# Altium PCB ESense.PcbDoc (part 2 of 3)
Units mil, origin at the board's own origin, x right, y up, seen from the top; angles counter-clockwise.
Board outline 9200 x 6300 mil, 4 copper layers (Top Layer, GND, POWER, Bottom Layer); 365 components, 215 nets, 1056 pads, 220 vias.
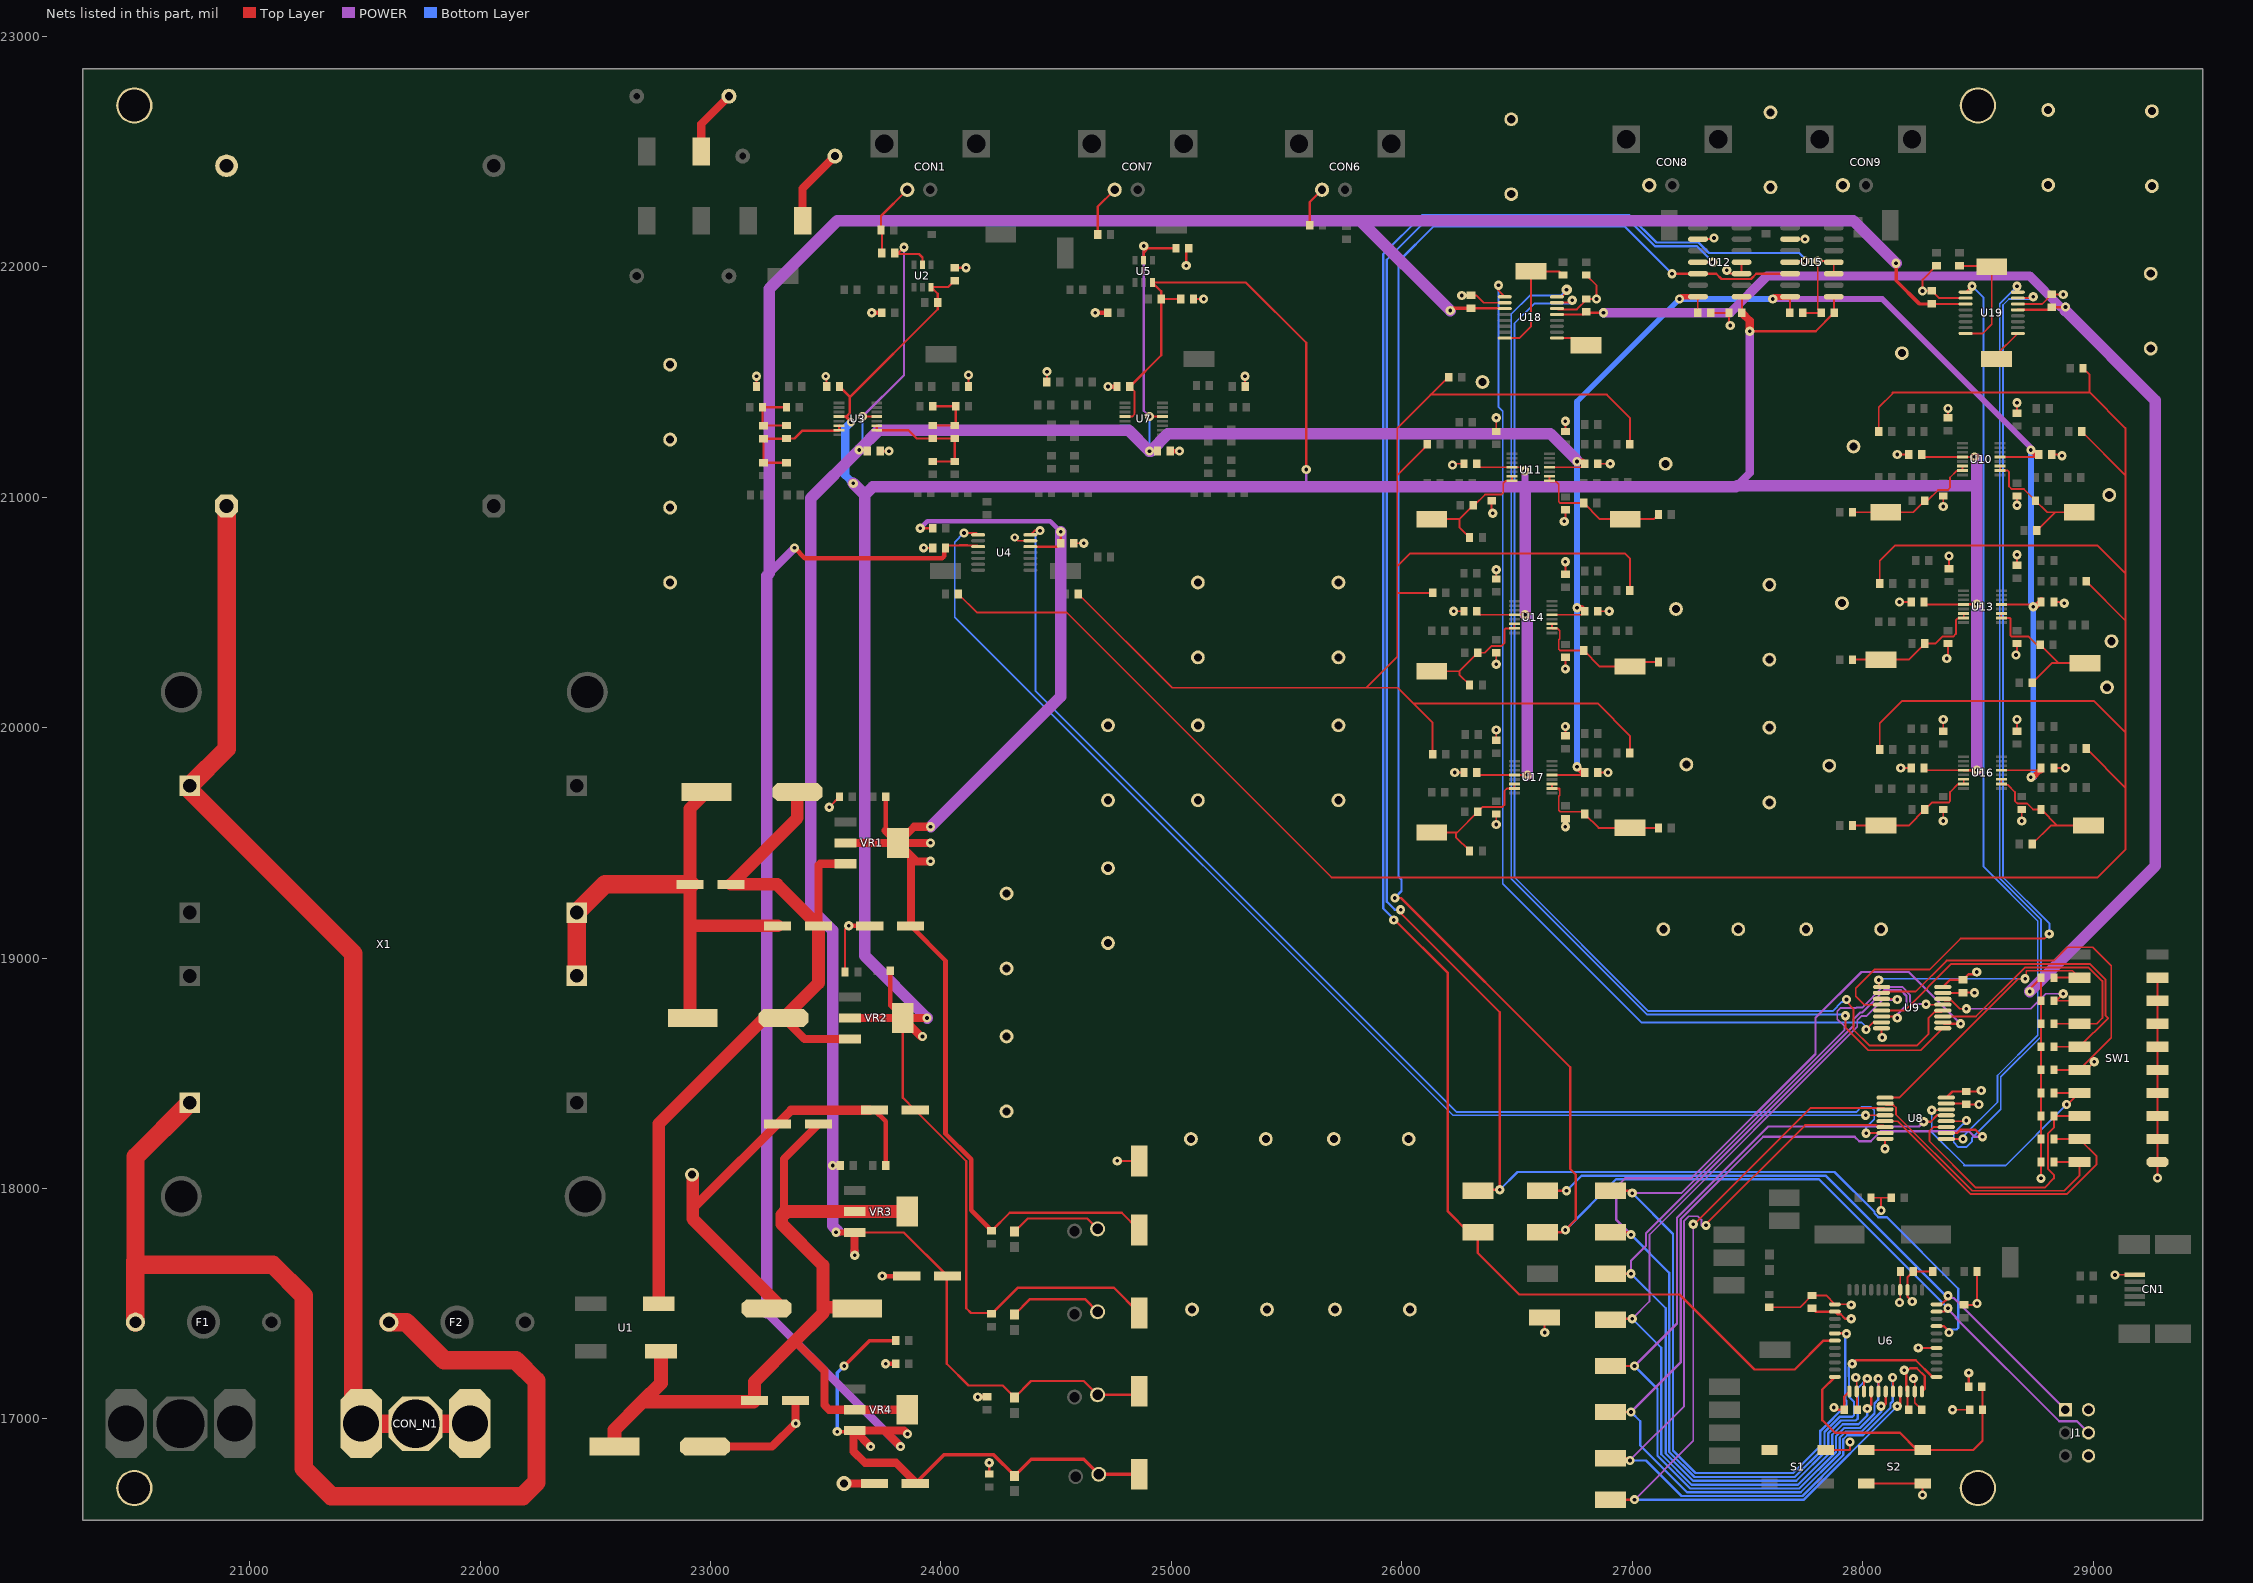
[diagram p4: the nets of this part, all layers, seen from the top]

## Via types
v1: diameter 40/36/36 (per signal layer), hole 16, Top Layer to Bottom Layer, tented both sides, 213 vias
v2: diameter 36, hole 16, Top Layer to Bottom Layer, 2 vias
v3: diameter 40/36/36 (per signal layer), hole 16, Top Layer to Bottom Layer, 1 vias
v4: diameter 35/36/36 (per signal layer), hole 16, Top Layer to Bottom Layer, tented both sides, 1 vias
v5: diameter 40/46/46 (per signal layer), hole 16, Top Layer to Bottom Layer, tented both sides, 1 vias
v6: diameter 60, hole 35, Top Layer to Bottom Layer, tented both sides, 1 vias
v7: diameter 65, hole 35, Top Layer to Bottom Layer, tented both sides, 1 vias

## Nets (pads, with @x,y where several pads share a name; then routed paths per layer and width w, separated by ;. In a path a pad name is that pad's centre, name@x,y a point inside that pad or via, vN(x,y) a via of type N, cw(c..) or ccw(c..) an arc to the next point about the centre after c; other vN are vias at no path point)
+2.5V: C4.1 C6.1 C16.1 C29.1 C44.1 C51.2 C59.2 C62.2 C81.2 C83.2 C88.2 C102.2 C104.2 R5.2 R7.2 R13.1 R44.2 TP2V5.1 U2.6 U3.4 U5.6 U7.4 U10.4 U11.4 U12.8 U13.4 U14.4 U15.8 U16.4 U17.4 VR2.3 | length 19017.4
  Top Layer w8: U7.4@24798.31,21349.84 24829.84,21349.84 24840,21360 24840,21460 C44.1@24820,21480 ; C104.2@26326,19805 26336.16,19794.84 U17.4@26488.31,19794.84 26544.84,19794.84 v1(26545,19795) ; C83.2@26326,20505 26341.16,20489.84 U14.4@26488.31,20489.84 v1@26534.84,20489.84 ; C62.2@26326,21145 26341.16,21129.84 U11.4@26478.31,21129.84 26520.16,21129.84 v1(26535,21115) ; U12.8@27474.49,21870 27476,21868.49 C51.2@27476,21800 ; C88.2@27876,21800 U15.8@27876,21868.49 ; C59.2@28256,21185 28266.16,21174.84 U10.4@28433.31,21174.84 ; C81.2@28256.16,20534.84 U13.4@28438.31,20534.84 ; C102.2@28266,19825 28276.16,19814.84 U16.4@28438.31,19814.84
  Top Layer w10: U3.4@23558.31,21349.84 23589.84,21349.84 23605,21365 23605,21435 ; C16.1@23560,21480 23605,21435 ; VR2.3@23834.17,18740 23834.17,18394.41 C6.1@23888.58,18340 24110,18118.58 24110,17480 24130,17460 24216,17460 R7.2@24220,17456 24334,17570 24750,17570 TP2V5.1@24860,17460 ; C4.1@24060,21940 24031.77,21911.77 U2.6@23957.4,21911.77 23986,21883.17 R5.2@23986,21845 23986,21816 23605,21435 ; C44.1@24820,21480 24956,21616 R44.2@24956,21860 ; C29.1@25040,21860 R44.2@24956,21860 ; v1(25585,21120) 25585,21670 25323.23,21931.77 U5.6@24917.4,21931.77 24956,21893.17 R44.2@24956,21860 ; v1(27510,21720) 27796,21720 C88.2@27876,21800 ; U10.4@28433.31,21174.84 v1@28484.84,21174.84 ; U16.4@28438.31,19814.84 28438.46,19815 v1(28495,19815) ; U13.4@28438.31,20534.84 v1@28484.84,20534.84
  Top Layer w15: 23589.84,21349.84 v4@23610,21329.69
  Top Layer w20: R13.1@23780,18945 23780,18794.17 VR2.3@23834.17,18740
  Top Layer w35: VR2.3@23605.83,18740 VR2.3@23834.17,18740 ; v1(23920,18660) 23914.17,18660 VR2.3@23834.17,18740 ; v1(23940,18740) VR2.3@23834.17,18740 ; C51.2@27476,21800 27510,21766 v1(27510,21720)
  POWER w8: v1(26535,20490) v1@26545,20480 ; 26535,21045 26535,21050 26540,21045
  POWER w10: 25585,21045 v1(25585,21120)
  POWER w30: 26535,21050 v1(26535,21115) ; v1(28485,21175) v1@28495,21165
  POWER w35: 26535,21045 26540,21045 ; 27455,21050 27510,21105 v1(27510,21720)
  POWER w50: v1(23620,21060) 23670,21010 ; 23667.5,21007.5 23670,21010 ; v1(23940,18740) 23670,19010 23670,21010 ; v1(26535,20490) 26535,21045 25585,21045 23705,21045 23670,21010 ; 26540,21045 27450,21045 ; v1(26545,19795) v1@26545,20480 ; 27455,21050 28495,21050 ; v1(28495,19815) v1(28495,20535) ; v1@28495,20540 28495,21050 ; v1@28495,21165 28495,21050
  Bottom Layer w35: v4(23610,21325) 23585,21300 23585,21095 v1(23620,21060)
+5V: C3.1 C28.1 C33.1 C34.1 C35.1 C36.1 C49.2 C50.2 C115.2 C117.2 J1.2 R3.2 R4.1 R34.1 R53.2 R57.1 R61.2 R62.2 R63.2 R64.2 R65.2 R66.2 R67.2 R68.2 R69.2 TP5V.1 U4.12 U6.14 U6.24 U6.34 U6.42 U6.44 U8.16 U9.16 U18.13 U19.13 VR1.3 | length 14101.3
  Top Layer w10: v1(23910,20865) R34.1@23965,20865 ; R3.2@24220,17816 24299,17895 24785,17895 TP5V.1@24860,17820 ; U4.12@24388.19,20785.59 24505.59,20785.59 C28.1@24520,20800 v1(24520,20850) ; U18.13@26673.19,21792.8 26788.8,21792.8 C117.2@26800,21804 26804,21800 v1(26875,21800) ; C35.1@27780,17480 27795,17465 27878.54,17465 U6.24@27879.53,17465.98 27891.02,17454.49 27904.4,17454.49 27923.89,17435 v1(27950,17435) ; v1(27875,17050) 27885,17040 C34.1@27920,17040 27920,17097.01 U6.34@27942.52,17119.53 ; v1(28180,17211) 28180,17213.98 v1@28175,17210 ; C36.1@28200,17040 28194.49,17045.51 U6.42@28194.49,17119.53 28189,17125.02 28189,17194 v1@28175,17210 ; v1(28215,17510) 28194.49,17530.51 U6.14@28194.49,17560.47 28194.49,17614.49 C33.1@28220,17640 R53.2@28304,17640 ; U6.44@28257.48,17119.53 28270,17132.05 28270,17185 28235,17220 28205,17220 28194.49,17209.49 v1@28175,17210 ; U9.16@28347.87,18874.57 28379.31,18906 C50.2@28435,18906 28459,18930 28485,18930 v1(28495,18940) ; U8.16@28362.87,18394.57 28389.31,18421 C49.2@28450,18421 28511,18421 v1(28515,18425) ; R57.1@28460,17140 v1(28460,17200) ; U19.13@28673.19,21812.8 28808.8,21812.8 C115.2@28820,21824 28879,21824 v1(28880,21825) ; v1(28725,18855) 28725,18866 R69.2@28774,18915 v1(28774,18044)
  Top Layer w20: 23760,19554.17 R4.1@23760,19700 ; C3.1@23868.58,19140 24020,18988.58 24020,18238.28 24131,18127.28 24131,17905 R3.2@24220,17816
  Top Layer w35: VR1.3@23585.83,19500 VR1.3@23814.17,19500 ; 23760,19554.17 VR1.3@23814.17,19500 ; C3.1@23868.58,19140 23870,19141.42 23870,19444.17 VR1.3@23814.17,19500 ; v1(23955,19420) 23894.17,19420 VR1.3@23814.17,19500 ; v1(23955,19500) VR1.3@23814.17,19500 ; v1(23955,19570) 23884.17,19570 VR1.3@23814.17,19500
  POWER w10: v1@28495,18925 v1(28495,18940)
  POWER w20: v1(23910,20865) 23940,20895 24475,20895 v1(24520,20850)
  POWER w25: v1@28860,21825 v1(28880,21825) v1@28880,21810
  POWER w40: v1(26875,21800) 27425,21800 27585,21960 28725,21960 v1@28860,21825 ; v1@28875,21820 v1(28880,21825)
  POWER w50: v1(23955,19570) 24520,20135 v1(24520,20850) ; v1(28725,18855) 29270,19400 29270,21420 v1@28880,21810
+6.3V: C1.1 C2.1 C7.1 C8.1 U1.4 VR1.1 VR2.1 | length 3659.1
  Top Layer w35: C8.1@23316.85,18740 23407.4,18649.45 VR2.1@23605.83,18649.45 ; C7.1@23468.58,19140 23468.58,19403.58 23474.45,19409.45 VR1.1@23585.83,19409.45
  Top Layer w55: U1.4@22775.28,17500 22775.28,17629.72 22775,17630 22775,18280 23235,18740 C8.1@23316.85,18740 23468.58,18891.73 C7.1@23468.58,19140 23288.58,19320 C1.1@23088.58,19320 23376.85,19608.27 C2.1@23376.85,19720
-2.5V: C5.1 C13.2 C17.1 C30.1 C45.1 C60.2 C63.2 C72.2 C82.2 C84.2 C103.2 C105.2 C106.2 CON4.2 D3.2 R28.2 TP_-2V5.1 U2.2 U3.13 U5.2 U7.13 U10.13 U11.13 U12.7 U13.13 U14.13 U15.7 U16.13 U17.13 VR3.3 | length 18246.8
  Top Layer w8: U11.13@26641.69,21129.84 26778.84,21129.84 C63.2@26794,21145 ; U17.13@26651.69,19794.84 26783.84,19794.84 C105.2@26794,19805 ; U14.13@26651.69,20489.84 26778.84,20489.84 C84.2@26794,20505 ; C72.2@27284,21800 27284,21868.49 U12.7@27285.51,21870 ; C106.2@27684,21800 U15.7@27684,21868.49 ; U10.13@28596.69,21174.84 28753.84,21174.84 C60.2@28764,21185 ; U16.13@28601.69,19814.84 28763.84,19814.84 C103.2@28774,19825 ; U13.13@28601.69,20534.84 v1@28740,20534.84
  Top Layer w10: v1(23530,18100) R28.2@23564,18100 ; VR3.3@23625.83,17809.45 23839.13,17809.45 C13.2@24028.58,17620 ; v1(23645,21205) 23675,21205 C17.1@23680,21200 ; v1(23660.16,21349.84) U3.13@23721.69,21349.84 ; v1(23840,22085) 23815,22060 C5.1@23800,22060 23805,22055 23905,22055 23920,22040 U2.2@23920,22008.23 ; C13.2@24025,17620 24025,17240 24120,17145 24268.46,17145 D3.2@24320,17093.46 24391.54,17165 24620,17165 CON4.2@24680,17105 24845,17105 TP_-2V5.1@24860,17120 ; U5.2@24880,22028.23 24880,22060 ; v1(24880,22090) 24880,22060 ; v1(24905,21200) C45.1@24940,21200 ; v1@24905.16,21349.84 U7.13@24961.69,21349.84 ; C30.1@25020,22080 24900,22080 24880,22060
  Top Layer w25: v1@23545.55,17809.45 VR3.3@23625.83,17809.45 ; v1(26760,19830) 26785,19805 C105.2@26794,19805 ; v1(26760,20520) 26779,20520 C84.2@26794,20505 ; v1(26760,21155) 26784,21155 C63.2@26794,21145 ; v1(27205,21860) 27215,21870 27282.49,21870 U12.7@27284,21868.49 ; v1(27610,21860) 27618.49,21868.49 U15.7@27684,21868.49 ; v1(28730,21205) 28750,21185 C60.2@28764,21185 ; v1@28740,19785 C103.2@28769,19814 ; v1(28740,20525) 28745,20520 28775,20550 C82.2@28775,20555 ; C103.2@28774,19814 C103.2@28774,19825
  Top Layer w35: v1(23625.83,17710.83) VR3.3@23625.83,17809.45
  POWER w10: v1(23660.16,21349.84) 23840,21529.69 v1(23840,22085) ; v1(24880,22090) 24880,21375 v1(24905,21350)
  POWER w25: v1(24905,21200) v1@24910,21200 ; v1(27610,21860) 28085,21860 28730,21215 v1(28730,21205)
  POWER w35: v1(23625.83,17710.83) v1@23625.83,17729.17
  POWER w50: 23525.12,19124.88 23435,19215 23435,20995 v1(23645,21205) 23730,21290 24815,21290 v1(24905,21200) ; 23530,19120 v1(23530,18100) 23530,17838 v1@23551.5,17816.5 ; v1@24910,21200 24985,21275 26645,21275 v1@26760,21160
  Bottom Layer w10: v1@23660.16,21210.16 v1(23660.16,21349.84) ; v1(24905,21200) v1(24905,21350)
  Bottom Layer w25: v1(26760,19830) v1(26760,20520) v1(26760,21155) 26760,21415 v1(27205,21860) v1(27610,21860) ; v1(28730,21205) 28730,20540 28740,20530 v1(28740,20525) 28740,19790 v1@28745,19785
  other v1: 23545,17810 28730,19785
-5V: C24.2 C27.1 C116.1 C118.1 CON5.2 D4.2 R36.2 TP-5V.1 U4.3 U18.3 U19.3 VR4.3 | length 15195.5
  Top Layer w10: C27.1@24020,20780 24030,20790 24081.16,20790 24082.16,20791 24114,20791 24115,20790 24157.4,20790 U4.3@24161.81,20785.59 ; C118.1@26300,21820 26445.2,21820 U18.3@26446.81,21818.39 ; C116.1@28301.61,21838.39 U19.3@28446.81,21838.39
  Top Layer w15: v1(23550,16945) 23621.38,16945 VR4.3@23625.83,16949.45 ; v1(23580,17230) 23690,17340 R36.2@23804,17340 ; C27.1@24015,20775 C27.1@24020,20780 ; D4.2@24320,16753.46 24391.54,16825 24620,16825 CON5.2@24685,16760 TP-5V.1@24860,16760 ; v1(26210,21810) 26220,21820 C118.1@26300,21820 ; v1(28145,22015) 28145,21940 28246.61,21838.39 C116.1@28301.61,21838.39
  Top Layer w16: C24.2@23888.58,16720 24013.58,16845 24228.46,16845 D4.2@24320,16753.46
  Top Layer w20: v1(23365,20780) 23410,20735 24005,20735 ; 24010,20740 24015,20745 C27.1@24015,20775
  Top Layer w35: VR4.3@23621.38,16945 23621.38,16858.62 23670,16810 23805,16810 23888.58,16726.42 C24.2@23888.58,16720 ; VR4.3@23630.28,16945 VR4.3@23625.83,16949.45 ; v1(23695,16880) 23695,16880.28 VR4.3@23625.83,16949.45 ; v1(23825,16880) 23755.55,16949.45 ; v1(23855,16935) 23840.55,16949.45 23755.55,16949.45 ; VR4.3@23625.83,16949.45 23755.55,16949.45
  POWER w35: 23245,17460 v1(23825,16880) ; 23245,20660 v1(23365,20780)
  POWER w50: 23245,17460 23245,20660 23255,20670 23255,21509.31 ; 23255,21520 23255,21905 23550,22200 25820,22200 ; v1(26210,21810) 25820,22200 ; v1(28145,22015) 27960,22200 25820,22200
  Bottom Layer w15: v1(23550,16945) 23550,17200 v1(23580,17230)
-6.3V: C18.2 C19.2 C25.2 C26.2 U1.3 VR3.1 VR4.1 | length 3840.9
  Top Layer w35: 23319,17885 23319,17896.12 23319,18129 C18.2@23470,18280 ; 23367.5,17337.5 23495,17210 23495,17060 23515,17040 VR4.1@23625.83,17040 VR4.1@23854.17,17040
  Top Layer w55: C25.2@23191.42,17080 23191.42,17161.42 23367.5,17337.5 23488.58,17458.58 23488.58,17485 ; 23310,17885 23310,17845 23488.58,17666.42 23488.58,17485 ; 23319,17896.12 23325.12,17890 23325.12,17900 VR3.1@23625.83,17900 VR3.1@23854.17,17900 ; C19.2@23636.85,17480 23631.85,17485 23488.58,17485
  Top Layer w60: C26.2@22583.15,16880 22583.15,16953.15 22705,17075 ; U1.3@22785.12,17293.31 22785.12,17155.12 22705,17075 ; C25.2@23191.42,17080 23186.42,17075 22705,17075
AUX_IN1: TP22.1 U19.9 | length 149
  Top Layer w8: TP22.1@28580,21600 28580,21617.24 U19.9@28673.19,21710.43
AUX_IN2: TP23.1 U18.9 | length 139.4
  Top Layer w8: U18.9@26673.19,21690.43 26769.57,21690.43 TP23.1@26800,21660
BOOT: R57.2 R60.1 S2.3 S2.4 U6.33 | length 1449.7
  Top Layer w10: U6.33@27879.53,17182.52 27825,17127.99 27825,16995 27880,16940 28161.57,16940 28235.91,16865.67 S2.3@28260,16865.67 ; S2.4@28015.91,16865.67 S2.3@28260,16865.67 ; R57.2@28520,17136 R60.1@28520,17040 28520,16905.67 28480,16865.67 S2.3@28260,16865.67
BP_1K-100K_OUT1: C65.1 R135.2 TP10.1 U10.10 U10.11 | length 588
  Top Layer w8: U10.11@28596.69,21135.47 U10.10@28596.69,21115.79 28629.21,21115.79 28635,21110 28635,21046.86 28646.86,21035 28700,21035 C65.1@28750,20985 28800,20935 28836,20935 ; R135.2@28756,20855 28836,20935 ; TP10.1@28940,20935 28836,20935
BP_1K-100K_OUT2: C67.1 R134.2 TP12.1 U11.10 U11.11 | length 612.7
  Top Layer w8: U11.11@26641.69,21090.47 U11.10@26641.69,21070.79 26645.47,21067.01 26669.46,21067.01 26681,21055.46 26681,20980.86 26686.86,20975 C67.1@26790,20975 26860,20905 TP12.1@26970,20905 27094,20905 R134.2@27114,20925
BP_100K-250K_OUT1: C89.1 R137.2 TP13.1 U13.6 U13.7 | length 611.8
  Top Layer w8: R137.2@27956,20295 TP13.1@28080,20295 28200,20295 C89.1@28270,20365 28315,20365 28345,20395 28393.14,20395 28404.69,20406.54 28404.69,20466.15 28413.54,20475 28437.52,20475 U13.7@28438.31,20475.79 U13.6@28438.31,20495.47
BP_100K-250K_OUT2: C90.1 R136.2 TP15.1 U14.6 U14.7 | length 567.2
  Top Layer w8: TP15.1@26130,20245 26250,20245 ; R136.2@26294,20185 26250,20229 26250,20245 ; U14.6@26488.31,20450.47 U14.7@26488.31,20430.79 26450.79,20430.79 26445,20425 26445,20366.86 26433.14,20355 26390.86,20355 26360.86,20325 C90.1@26330,20325 26250,20245
BP_250K-500K_OUT1: C86.1 R139.2 TP14.1 U13.10 U13.11 | length 656.1
  Top Layer w8: U13.11@28601.69,20495.47 U13.10@28601.69,20475.79 28639.21,20475.79 28641,20474 28641,20400.86 28646.86,20395 28720,20395 28755,20360 C86.1@28770,20360 28850,20280 ; R139.2@28736,20195 28821,20280 28850,20280 ; TP14.1@28965,20280 28850,20280
BP_250K-500K_OUT2: C87.1 R138.2 TP16.1 U14.10 U14.11 | length 612.1
  Top Layer w8: U14.11@26651.69,20450.47 U14.10@26651.69,20430.79 26652.48,20430 26676.46,20430 26685.31,20421.15 26685.31,20385.46 26681,20381.14 26681,20340.86 26686.86,20335 C87.1@26790,20335 26860,20265 TP16.1@26990,20265 27010,20285 R138.2@27114,20285
BP_500K-2MHZ_OUT1: C111.1 R141.2 TP18.1 U16.6 U16.7 | length 600.1
  Top Layer w8: R141.2@27956,19575 TP18.1@28080,19575 28200,19575 C111.1@28270,19645 28300,19675 28373.14,19675 28379,19680.86 28379,19720.46 28414.32,19755.79 U16.7@28438.31,19755.79 U16.6@28438.31,19775.47
BP_500K-2MHZ_OUT2: C112.1 R140.2 TP20.1 U17.6 U17.7 | length 596.6
  Top Layer w8: TP20.1@26130,19545 26235,19545 ; R140.2@26294,19465 26235,19524 26235,19545 ; U17.6@26488.31,19755.47 U17.7@26488.31,19735.79 26455.79,19735.79 26445,19725 26445,19665 26435,19655 26350,19655 C112.1@26330,19635 26240,19545 26235,19545
CNTRL_SEL: R69.1 SW1.12 U8.1 U9.1 | length 1887.4
  Top Layer w8: v1(28070,18905) 28070,18886.69 U9.1@28082.13,18874.57 ; U8.1@28097.13,18394.57 28159.57,18394.57 28675,18910 v1(28705,18910) 28710,18915 28710,18945 28910.51,18945 SW1.12@28940.51,18915 R69.1@28830,18915
  Bottom Layer w8: v1(28070,18905) 28070,18910 v1(28705,18910)
CS0: TP_CS0.1 U6.8 U12.4 | length 8498.5
  Top Layer w10: v1@25980,19210 26425,18765 v1(26425,17995) 26335,17995 TP_CS0.1@26330,17990 ; U12.4@27285.51,22020 v1(27350,22020) ; U6.8@28320.47,17402.99 28352.24,17402.99 v1@28367.23,17388
  POWER w10: v1@28367.23,17388 v1@28380,17375.23
  Bottom Layer w10: v1@25980,19210 25970,19210 25935,19245 25935,22030 26113,22208 26979.88,22208 27098.88,22089 27281,22089 v1(27350,22020) ; v1(26425,17995) 26502,18072 27878,18072 28051,17899 28051,17892.99 28067.99,17876 28104,17876 28415,17565 28415,17396 28407,17388 v1@28367.23,17388
  other v1: 28375,17375 25995,19210
CS1: TP_CS1.1 U6.28 U15.4 | length 8395.8
  Top Layer w10: v1@25975,19160 26200,18935 26200,17900 26290,17810 TP_CS1.1@26330,17810 26330,17720 26510,17540 27205,17540 27530,17215 27705,17215 27830,17340 U6.28@27879.53,17340 ; U15.4@27685.51,22020 27690.51,22025 v1@27760,22025
  Bottom Layer w10: v1@25966.01,19168.99 25919,19216 25919,22054 26089,22224 26986.51,22224 27105.51,22105 27287.63,22105 27332.63,22060 27725,22060 v1@27760,22025
  other v1: 25965,19165 27750,22025
F_MCU_SEL0: TP_F0.1 U6.41 U8.3 | length 3827.3
  Top Layer w8: v1(27265,17845) 27270,17845 27775,18350 28090.51,18350 U8.3@28097.13,18343.39
  Top Layer w10: TP_F0.1@26905,16650 v1(27010,16650) ; v1(28150,17055) 28162.99,17067.99 U6.41@28162.99,17119.53
  POWER w8: v1(27010,16650) 27265,16905 v1(27265,17845)
  Bottom Layer w10: v1(27010,16650) 27745,16650 v1(28150,17055)
F_MCU_SEL1: TP_F1.1 U6.40 U8.6 | length 3917.5
  Top Layer w8: v1@27310,17840 27312.5,17837.5 27750,18275 28059.12,18275 28060.77,18273.35 28090.39,18273.35 U8.6@28097.13,18266.61
  Top Layer w10: TP_F1.1@26905,16830 26980,16830 v1(26990,16820) ; v1(28130,17180) 28131.5,17178.5 U6.40@28131.5,17119.53
  POWER w8: v1(26990,16820) 27225,17055 27225,17860 27245,17880 27285,17880 27300,17865 27300,17840 27305,17835 v1@27310,17840
  Bottom Layer w10: v1(26990,16820) 27060,16820 27214,16666 27738.37,16666 27916,16843.63 27916,16912.01 27932.99,16929 28001.37,16929 28121,17048.63 28121,17067.01 28130,17076.01 v1(28130,17180)
  other v1: 27320,17840
F_MCU_SEL2: TP_F2.1 U6.39 U8.10 | length 4269.1
  Top Layer w10: TP_F2.1@26905,17030 v1(26995,17030) ; v1(28080,17055) 28090,17055 28100,17065 U6.39@28100,17119.53 ; U8.10@28362.87,18241.02 28410.01,18241.02 28423.99,18255 28490,18255 v1(28520,18225)
  POWER w10: v1(26995,17030) 27210,17245 27210,17866.21 27568.79,18225 27965,18225 27985,18205 28035,18205 28079,18249 28461,18249 28485,18225 v1(28520,18225) ; v1@28080,17050 v1(28080,17055)
  Bottom Layer w10: v1(26995,17030) 27035,16990 27035,16885 27238,16682 27731.75,16682 27900,16850.25 27900,16918.64 27926.36,16945 27994.75,16945 28080,17030.25 v1(28080,17055)
F_MCU_SEL3: TP_F3.1 U6.38 U8.13 | length 3997.4
  Top Layer w10: TP_F3.1@26905,17230 v1(27010,17230) ; v1(28067.01,17175) 28068.5,17173.5 U6.38@28068.5,17119.53 ; v1(28265,18290) 28295,18290 28322.8,18317.8 U8.13@28362.87,18317.8
  POWER w10: v1(27010,17230) 27194,17414 27194,17872.84 27590.16,18269 28244,18269 v1(28265,18290)
  Bottom Layer w10: v1(27010,17230) 27110,17130 27110,16840 27252,16698 27725.12,16698 27884,16856.88 27884,16925.27 27919.73,16961 27988.12,16961 28051,17023.88 28051,17067.01 28067.01,17083.02 v1(28067.01,17175)
F_MCU_SEL4: TP_F4.1 U6.37 U9.3 | length 3944.7
  Top Layer w8: U9.3@28082.13,18823.39 28148.39,18823.39 28150,18821.77 v1(28150,18820)
  Top Layer w10: TP_F4.1@26905,17430 26910,17435 v1(27000,17435) ; v1(28020,17045) 28037.01,17062.01 U6.37@28037.01,17119.53
  POWER w8: v1(27000,17435) 27075,17510 27075,17800 27976.22,18701.22 27976.22,18730.01 27995.24,18749.02 28017.3,18749.02 28085.85,18817.57 28150,18817.57 v1(28150,18820)
  Bottom Layer w10: v1(27000,17435) 27126,17309 27126,16846.63 27258.63,16714 27718.49,16714 27868,16863.51 27868,16931.89 27913.11,16977 27981.49,16977 28020,17015.51 v1(28020,17045)
F_MCU_SEL5: TP_F5.1 U6.36 U9.6 | length 4199.2
  Top Layer w10: TP_F5.1@26905,17630 v1(26995,17630) ; U6.36@28005.51,17119.53 28005.51,17160.51 v1(28020,17175) ; U9.6@28082.13,18746.61 28148.39,18746.61 28150,18745 v1(28150,18740)
  POWER w10: v1(26995,17630) 26995,17686.21 27060,17751.21 27060,17806.21 27955.01,18701.22 27960,18706.21 27960,18735 27989.02,18764.02 27998.01,18764.02 28093.99,18860 28165,18860 28190,18835 28190,18795 28150,18755 v1(28150,18740)
  Bottom Layer w10: v1(26995,17630) 27145,17480 27145,16850.25 27263.39,16731.86 27711.86,16731.86 27850,16870 27850,16936.52 27906.48,16993 27970,16993 27978.43,17001.43 27978.43,17133.43 v1(28020,17175)
F_MCU_SEL6: TP_F6.1 U6.1 U9.10 | length 5133.8
  Top Layer w10: TP_F6.1@26905,17810 26985,17810 v1(26995,17800) ; v1@27950,17240 v1(27955,17240) 27970,17255 28230,17255 28302.48,17182.52 U6.1@28320.47,17182.52 ; U9.10@28347.87,18721.02 28353.61,18715.29 28384.64,18715.29 28384.93,18715 v1(28425,18715)
  POWER w10: v1(26995,17800) 26930,17865 26930,18005 26970,18045 27256.36,18045 27795.68,18584.32 27795.68,18740.68 27995,18940 28200,18940 v1(28425,18715)
  Bottom Layer w10: v1(26995,17800) 27161,17634 27161,16856.88 27270.02,16747.86 27705.24,16747.86 27834,16876.63 27834,16943.15 27899.85,17009 27955,17009 27962.43,17016.43 27962.43,17074.57 27941,17096 27941,17192.01 ; 27940,17185 27940,17225 v1(27955,17240)
F_MCU_SEL7: TP_F7.1 U6.27 U9.13 | length 4468.3
  Top Layer w8: v1(28275,18800) 28277.2,18797.8 U9.13@28347.87,18797.8
  Top Layer w10: TP_F7.1@26905,17990 26990,17990 v1(27000,17980) ; U6.27@27879.53,17371.5 27928.5,17371.5 v1(27930,17370)
  POWER w8: v1(27000,17980) 27212.57,17980 27921.47,18688.9 27921.47,18703.53 27890,18735 27890,18770 27903,18783 27970,18783 27972,18785 27997.77,18785 28087.77,18875 28171.21,18875 28205,18841.21 28205,18810 28215,18800 v1(28275,18800)
  Bottom Layer w10: v1(27000,17980) 27177,17803 27177,16863.51 27274.89,16765.62 27698.61,16765.62 27816.49,16883.51 27816.49,16948.27 27930,17061.78 27930,17078.37 27924,17084.37 27924,17364 v1(27930,17370)
F_SEL0: U4.1 U8.4 | length 5379.5
  Top Layer w8: v1(24100,20845) 24153.58,20845 U4.1@24161.81,20836.77 ; v1(28012.8,18317.8) U8.4@28097.13,18317.8
  Bottom Layer w8: v1(24100,20845) 24060,20805 24060,20480 26222.2,18317.8 v1(28012.8,18317.8)
F_SEL1: U4.14 U8.7 | length 5362.8
  Top Layer w8: U4.14@24388.19,20836.77 24406.42,20855 v1(24430,20855) ; v1(28015,18240) 28016.02,18241.02 U8.7@28097.13,18241.02
  Bottom Layer w8: v1(24430,20855) 24410,20835 24410,20160 26238.2,18331.8 27971.8,18331.8 27995,18355 28035,18355 28050,18340 28050,18300 28015,18265 v1(28015,18240)
F_SEL2: U8.9 U19.1 | length 4071.6
  Top Layer w8: U8.9@28362.87,18215.43 28425.43,18215.43 28430,18220 v1(28435,18215) ; U19.1@28446.81,21889.57 28472.24,21915 v1(28475,21915)
  Bottom Layer w8: v1(28435,18215) 28430,18220 28585,18375 28585,18490.4 28760,18665.4 28760,19161 28525,19396 28525,21865 v1(28475,21915)
F_SEL3: U8.12 U19.16 | length 4279.5
  Top Layer w8: U8.12@28362.87,18292.2 28447.2,18292.2 v1(28450,18295) ; v1(28670,21915) 28673.19,21911.81 U19.16@28673.19,21889.57
  Bottom Layer w8: v1(28450,18295) 28450,18279.6 28434.6,18279.6 28395,18240 28395,18200 28415,18180 28450,18180 28475,18205 28475,18220 28599,18344 28599,18484.6 28774,18659.6 28774,19166.8 28595,19345.8 28595,21840 v1(28670,21915)
F_SEL4: U9.4 U19.15 | length 4127.4
  Top Layer w8: U9.4@28082.13,18797.8 28007.2,18797.8 27970,18835 27970,18870 28050,18950 28290,18950 28425,19085 28790,19085 v1(28810,19105) ; U19.15@28673.19,21863.98 28674.21,21865 28735,21865 v1(28740,21870)
  Bottom Layer w8: v1(28740,21870) 28730,21860 28635,21860 28609,21834 28609,19351.6 28810,19150.6 v1(28810,19105)
F_SEL5: U9.7 U18.1 | length 4592.2
  Top Layer w8: v1(26420,21920) 26420,21896.38 U18.1@26446.81,21869.57 ; v1(28015,18690) 28046.02,18721.02 U9.7@28082.13,18721.02
  Bottom Layer w8: v1(26420,21920) 26420,21391 26438,21373 26438,19322 27038.98,18721.02 27995,18721.02 28015,18701.02 v1(28015,18690)
F_SEL6: U9.9 U18.16 | length 5042
  Top Layer w8: U18.16@26673.19,21869.57 26694.57,21869.57 v5@26715,21890 ; v1@27925,18755 27925,18700 28025,18600 28252.44,18600 U9.9@28347.87,18695.43
  Bottom Layer w8: v5(26715,21900) 26690,21875 26555,21875 26475,21795 26475,19345 27065,18755 27925,18755 v1(27925,18750)
F_SEL7: U9.12 U18.15 | length 5113.1
  Top Layer w8: U18.15@26673.19,21843.98 26674.21,21845 26739.6,21845 v1@26740.98,21846.39 ; v1@27930,18810 27960,18780 27960,18690 28030,18620 28235,18620 28285,18670 28285,18738.95 28311.52,18765.47 28341.14,18765.47 U9.12@28347.87,18772.2
  Bottom Layer w8: v1@26740.98,21846.39 26734.6,21840 26575,21840 26489,21754 26489,19350.8 27069.8,18770 27870,18770 27910,18810 v1@27930,18810
  other v1: 27930,18820 26740,21855
F_SW_SEL0: R61.1 SW1.20 U8.2 | length 1216.1
  Top Layer w8: U8.2@28097.13,18368.98 28097.13,18367.87 28102.76,18362.24 28133.48,18362.24 28144.53,18351.2 28144.53,18320.47 28475,17990 28875,17990 28940.51,18055.51 SW1.20@28940.51,18115 R61.1@28830,18115
F_SW_SEL1: R62.1 SW1.19 U8.5 | length 1373
  Top Layer w8: U8.5@28097.13,18292.2 28152.8,18292.2 28469,17976 28885.73,17976 29015,18105.27 29015,18140.51 SW1.19@28940.51,18215 ; R62.1@28830,18215 SW1.19@28940.51,18215 ; SW1.19@28960,18215 SW1.19@28940.51,18215
F_SW_SEL2: R63.1 SW1.18 U8.11 | length 1167.6
  Top Layer w8: U8.11@28362.87,18266.61 28306.61,18266.61 28290,18250 28290,18205 28491,18004 28790,18004 28830,18044 28830,18060 28804,18086 28804,18238.14 28830,18264.14 R63.1@28830,18315 SW1.18@28940.51,18315
F_SW_SEL3: R64.1 SW1.17 U8.14 | length 1128.2
  Top Layer w8: v1(28300,18340) 28359.49,18340 U8.14@28362.87,18343.39 ; R64.1@28830,18415 SW1.17@28940,18415 ; v1(28885,18365) 28890,18365 SW1.17@28940,18415 ; SW1.17@28940.51,18399.22 SW1.17@28940.51,18415 SW1.17@28940,18415
  POWER w8: v1@28880,18360 v1(28885,18365)
  Bottom Layer w8: v1(28300,18340) 28300,18245 28445,18100 ; 28440,18100 28445,18100 ; v1(28885,18365) 28620,18100 28445,18100
F_SW_SEL4: R65.1 SW1.16 U9.2 | length 1810.3
  Top Layer w8: U9.2@28082.13,18848.98 28088.15,18855 28230,18855 28364,18989 28830.29,18989 28888.34,19047.05 28997.95,19047.05 29079,18966 29079,18653.49 SW1.16@28940.51,18515 ; R65.1@28830,18515 SW1.16@28940.51,18515 ; v1(29005,18550) 28970,18515 SW1.16@28940.51,18515
F_SW_SEL5: R66.1 SW1.15 U9.5 | length 1542
  Top Layer w8: U9.5@28082.13,18772.2 28182.2,18772.2 28385,18975 28984.8,18975 29054,18905.8 29054,18750.49 29065,18739.49 SW1.15@28940.51,18615 R66.1@28830,18615
F_SW_SEL6: R67.1 SW1.14 U9.11 | length 1184.9
  Top Layer w8: U9.11@28347.87,18746.61 28491.82,18746.61 28704.2,18959 28981,18959 29040,18900 29040,18740 29015,18715 SW1.14@28940.51,18715 R67.1@28830,18715
F_SW_SEL7: R68.1 SW1.13 U9.14 | length 730
  Top Layer w8: U9.14@28347.87,18823.39 28354.61,18816.65 28384.23,18816.65 28420.88,18780 v1(28450,18780) ; v1(28870,18845) 28840,18815 R68.1@28830,18815 SW1.13@28940.51,18815
  POWER w8: v1(28450,18780) 28730,18780 28795,18845 v1(28870,18845)
FILTER_IN1: C55.1 C73.2 C76.1 C94.2 C97.1 R72.1 R122.2 R131.2 | length 12106.5
  Top Layer w8: R122.2@24076,20580 24156,20500 24545,20500 25695,19350 29020,19350 29140,19470 29140,19740 ; R72.1@28070,21285 28070,21390 28130,21450 28130,21455 28985,21455 ; C94.2@28074,19905 28074,20019 28170,20115 29005,20115 29140,19980 ; C73.2@28074,20625 28074,20724 28140,20790 29020,20790 29140,20670 ; C55.1@28950,21285 29140,21095 ; R131.2@28956,21560 28985,21531 28985,21455 ; C97.1@28970,19910 29140,19740 ; C76.1@28970,20635 29140,20465 ; 28985,21455 29140,21300 29140,21095 ; 29140,19740 29140,19980 ; 29140,19980 29140,20465 ; 29140,20465 29140,20670 ; 29140,20670 29140,21095
FILTER_IN2: C57.1 C77.2 C80.1 C98.2 C101.1 R74.1 R123.2 R130.2 | length 7030.6
  Top Layer w8: R123.2@24596,20580 25003,20173 25845,20173 ; R74.1@26110,21230 26110,21225 25980,21095 ; C98.2@26134,19885 26134,20021 26050,20105 ; C77.2@26134,20585 25985,20585 25980,20580 ; R130.2@26207.5,21527.5 26125,21445 ; C101.1@26990,19890 26990,19965 26850,20105 26050,20105 ; C80.1@26990,20595 26990,20735 26970,20755 26035,20755 25980,20700 ; C57.1@26990,21230 26990,21345 26890,21445 26125,21445 ; 25845,20173 25980,20308 25980,20580 ; 25845,20173 25982,20173 26050,20105 ; 25980,20580 25980,20700 ; 25980,20700 25980,21095 ; 25980,21095 25980,21300 26125,21445
FILTER_OUT1: R128.2 TP17.1 U19.8 | length 515.6
  Top Layer w8: R128.2@28420,22004 TP17.1@28556,22004 ; U19.8@28446.81,21710.43 28520.43,21710.43 28560,21750 TP17.1@28560,22000
FILTER_OUT2: R126.2 TP8.1 U18.8 | length 520.3
  Top Layer w8: U18.8@26446.81,21690.43 26510.43,21690.43 26560,21740 TP8.1@26560,21980 26684,21980 R126.2@26700,21964
GND: C1.2 C2.2 C3.2 C4.2 C5.2 C6.2 C7.2 C8.2 C13.1 C16.2 C17.2 C18.1 C19.1 C23.2 C24.1 C25.1 C26.1 C27.2 C28.2 C29.2 C30.2 C33.2 C34.2 C35.2 C36.2 C39.2 C40.2 C41.2 C44.2 C45.2 C48.2 C49.1 C50.1 C51.1 C58.1 C59.1 C60.1 C61.1 C62.1 C63.1 C68.1 C69.1 C70.1 C71.1 C72.1 C81.1 C82.1 C83.1 C84.1 C85.1 C88.1 C91.1 C92.1 C93.1 C102.1 C103.1 C104.1 C105.1 C106.1 C113.1 C114.1 C115.1 C116.2 C117.1 C118.2 CN1.5 CON1.2 CON2.2 CON3.2 CON6.2 CON7.2 CON8.2 CON9.2 D1.2 D2.2 J1.6 pad.0 pad.1 pad.2 pad.3 pad.4 pad.5 pad.6 pad.7 pad.8 pad.9 pad.10 R2.1 R6.1 R8.1 R10.2 R11.1 R15.2 R18.2 R21.1 R24.2 R30.1 R31.1 R32.1 R33.1 R35.2 R38.1 R39.1 R40.1 R45.1 R52.2 R56.2 R60.2 R76.1 R77.1 R91.1 R92.1 R93.1 R94.1 R108.1 R109.1 R110.1 R111.1 R118.1 R119.1 R127.2 R129.2 S1.3 S1.4 S2.1 S2.2 SW1.1 SW1.2 SW1.3 SW1.4 SW1.5 SW1.6 SW1.7 SW1.8 SW1.9 TP_GND2.1 TP_GND.1 U4.13 U6.5 U6.15 U6.23 U6.35 U6.43 U8.8 U8.15 U9.8 U9.15 U12.2 U12.10 U12.11 U15.2 U15.10 U15.11 U18.2 U18.14 U19.2 U19.14 X1.9 X1.10 | length 15320.9
  Top Layer w8: R11.1@23200,21485 v1(23200,21525) ; v2(23500,21525) 23504,21521 C16.2@23504,21480 ; v1(23925,20780) C27.2@23964,20780 ; R8.1@24120,21480 v1@24120,21525 ; v2(24320,20825) 24333.82,20811.18 U4.13@24388.19,20811.18 ; R45.1@24460,21500 v1(24460,21545) ; C28.2@24576,20800 v1(24620,20800) ; v1(24765,18120) TP_GND.1@24860,18120 ; C29.2@25096,21860 v1(25140,21860) ; R40.1@25320,21480 v1(25320,21525) ; v1(26220,21140) 26215,21140 26220,21145 C62.1@26270,21145 ; v1(26225,20505) C83.1@26270,20505 ; v1(26230,19805) C104.1@26270,19805 ; v1(26260,21875) 26261,21876 C118.2@26300,21876 26322.98,21876 26355,21843.98 U18.2@26446.81,21843.98 ; C70.1@26390,20985 26390,20935 v1(26395,20930) ; v1(26410,19580) C114.1@26410,19625 ; R110.1@26410,19945 v1(26410,19990) ; v1(26410,20275) C92.1@26410,20325 ; R93.1@26410,20645 v1(26410,20685) ; C61.1@26410,21285 v1(26410,21345) ; v1(26620,17375) TP_GND2.1@26620,17440 ; U18.14@26673.19,21818.39 26676.57,21815 26760,21815 26805,21860 v1(26845,21860) 26845,21919 R127.2@26800,21964 ; v1(26705,20895) 26710,20900 C71.1@26710,20945 ; v1(26710,19570) R119.1@26710,19605 ; R111.1@26710,19965 v1(26710,20005) ; v1(26710,20255) C93.1@26710,20305 ; R94.1@26710,20665 v1(26710,20720) ; R77.1@26710,21285 v1(26710,21330) ; C105.1@26850,19805 v1(26895,19805) ; C84.1@26850,20505 v1(26900,20505) ; C63.1@26850,21145 v1(26905,21145) ; U12.2@27285.51,22120 27350,22120 v1(27355,22125) ; C72.1@27340,21800 C51.1@27420,21800 27420,21750 v1(27425,21745) ; v1@27405,21970 U12.10@27474.49,21970 U12.11@27474.49,22020 ; R56.2@27595,17484 27596,17485 27729,17485 C35.2@27780,17536 27841.01,17536 U6.23@27879.53,17497.48 27947.52,17497.48 v1(27950,17495) ; U15.2@27685.51,22120 v1(27750,22120) ; C106.1@27740,21800 C88.1@27820,21800 27805,21815 v1(27805,22025) 27869.49,22025 U15.11@27874.49,22020 U15.10@27874.49,21970 ; S1.3@27815.91,16865.67 27945,16865.67 v1(27945,16900) ; v1(27970,17180) 27974.02,17184.02 U6.35@27974.02,17119.53 ; C34.2@27976,17040 U6.35@27976,17117.54 ; S2.2@28015.91,16720 S2.1@28260,16720 ; C41.2@28036,17960 28080,17960 ; v1(28080,17905) 28080,17960 ; U9.8@28082.13,18695.43 28082.13,18657.87 v1(28085,18655) ; v1(28097.13,18172.87) U8.8@28097.13,18215.43 ; C39.2@28124,17960 28080,17960 ; v1(28150,21185) C59.1@28200,21185 ; v1(28160,17505) 28162.99,17507.99 U6.15@28162.99,17560.47 C33.2@28162.99,17638.99 ; v1(28160,20545) C81.1@28210,20545 ; v1(28165,19825) C102.1@28210,19825 ; v1(28220,17175) 28225,17180 28225.98,17179.02 U6.43@28225.98,17119.53 28225.98,17070.02 C36.2@28256,17040 ; S2.1@28235.91,16720 S2.1@28260,16720 ; v1(28241.5,17308.5) U6.5@28320.47,17308.5 ; v1(28260,16670) S2.1@28260,16720 ; R129.2@28320,22004 28260,21944 v1(28260,21895) 28261,21896 C116.2@28300,21896 28332.02,21863.98 U19.2@28446.81,21863.98 ; U9.15@28347.87,18848.98 C50.1@28433.98,18848.98 ; v1(28350,19595) C113.1@28350,19645 ; R108.1@28350,19985 v1(28350,20035) ; v1(28350,20960) C68.1@28350,21005 ; U8.15@28362.87,18368.98 C49.1@28446.02,18368.98 ; v1(28365,20300) 28370,20300 C85.1@28370,20365 ; C58.1@28370,21345 v1(28370,21385) ; R91.1@28375,20690 v1(28375,20745) ; v1(28390,17040) R60.2@28464,17040 ; C50.1@28435,18850 v1(28485,18850) ; C48.2@28440,17496 28441,17495 28490,17495 v1(28496,17501) C40.2@28496,17640 ; C49.1@28450,18365 v1(28505,18365) ; v1(28665,20315) 28670,20320 C91.1@28670,20365 ; R109.1@28670,19985 v1(28670,20035) ; R92.1@28670,20705 v1(28670,20750) ; v1(28670,20965) C69.1@28670,21005 ; R76.1@28670,21365 v1(28670,21410) ; U19.14@28673.19,21838.39 28778.39,21838.39 C115.1@28820,21880 v1(28870,21880) ; v1(28690,19595) R118.1@28690,19645 ; C60.1@28820,21185 28870,21185 v1(28865,21180) ; C103.1@28830,19825 v1(28880,19825) ; C82.1@28830,20545 28880,20545 v1(28875,20540) ; v1(29095,17625) 29095.98,17625.98 CN1.5@29180,17625.98 ; v1(29279.49,18045.51) SW1.9@29279.49,18915
  Top Layer w10: v1(23515,19655) R6.1@23560,19700 ; R18.2@23584,18940 23584,19124 v1(23600,19140) ; C6.2@23690,18340 C6.2@23691.42,18341.42 ; C17.2@23736,21200 v1(23775,21200) ; C5.2@23744,22060 23744,22156 R2.1@23740,22160 23740,22220 CON1.2@23854,22334 ; C4.2@24060,21996 v1(24109,21996) ; R24.2@24210,16761 v1(24210,16810) ; D2.2@24320,17453.46 24386.54,17520 24625,17520 CON3.2@24680,17465 ; D1.2@24320,17813.46 24376.54,17870 24635,17870 CON2.2@24680,17825 ; R39.1@24680,22140 24680,22260 CON7.2@24754,22334 ; v1@25061,21996 25065,22000 25065,22069 C30.2@25076,22080 ; R38.1@25600,22180 25600,22280 CON6.2@25654,22334
  Top Layer w20: v1(23600,19140) C3.2@23691.42,19140 ; v1(23700,21800) R10.2@23744,21800 ; C6.2@23711.42,18340 23760,18291.42 R21.1@23760,18100 ; v1(23745,17620) C13.1@23851.42,17620 ; v1(23760,17240) R35.2@23804,17240 ; v1(24160,17095) 24161,17096 R15.2@24200,17096 ; v1(24670,21800) R52.2@24724,21800 ; v1(24725,21480) C44.2@24764,21480 ; C45.2@24996,21200 v1(25035,21200)
  Top Layer w35: R30.1@22960,22500 22960,22620 R33.1@23080,22740 ; C26.1@22976.85,16880 23267.17,16880 v3@23368.58,16981.42 ; C25.1@23368.58,17080 v3@23368.58,16981.42 ; v3(23370,16980) v3@23368.58,16981.42 ; R31.1@23400,22200 23400,22340 R32.1@23540,22480 ; v7(23580,16720) C24.1@23711.42,16720
  Top Layer w40: 22923.15,17913.15 23350,18340 C6.2@23690,18340
  Top Layer w55: v6(22920,18060) 22923.15,18056.85 22923.15,17913.15 22923.15,17868.27 C19.1@23311.42,17480 ; C8.2@22923.15,18740 22911.42,18751.73 22911.42,19140 ; C2.2@22983.15,19720 22911.42,19648.27 C1.2@22911.42,19320 22911.42,19140 ; C7.2@23291.42,19140 22911.42,19140
  Top Layer w80: X1.10@22419.96,18922.8 X1.9@22419.96,19197.6 22542.36,19320 C1.2@22911.42,19320
  POWER w8: v1(23200,21525) v1@23205,21520
  other v1: 24120,21530 27410,21985 25065,22005
HP_1MHZ_OUT1: R116.2 R143.2 TP19.1 U16.10 U16.11 | length 637.2
  Top Layer w8: U16.11@28601.69,19775.47 U16.10@28601.69,19755.79 28605.47,19752.01 28629.46,19752.01 28661,19720.46 28661,19680.86 28670.86,19671 28713.14,19671 28739.14,19645 R116.2@28774,19645 28844,19575 ; R143.2@28736,19495 28816,19575 28844,19575 ; TP19.1@28980,19575 28844,19575
HP_1MHZ_OUT2: R117.2 R142.2 TP21.1 U17.10 U17.11 | length 613.8
  Top Layer w8: U17.11@26651.69,19755.47 U17.10@26651.69,19735.79 26684.21,19735.79 26685,19735 26685,19727 26685.31,19726.69 26685.31,19706.05 26681,19701.74 26681,19640.86 26686.86,19635 26784,19635 R117.2@26794,19625 26854,19565 TP21.1@26990,19565 R142.2@27114,19565
L: F1.2 F2.1 X1.6 | length 4870.9
  Top Layer w80: F1.2@20504.72,17420 20504.72,17684.72 ; X1.6@20740.04,18372.4 20505,18137.36 20505,17670 21100,17670 21235,17535 21235,16785 21355,16665 22185,16665 22245,16725 22245,17165 22155,17255 21845,17255 21680,17420 F2.1@21604.72,17420
LP_1K_OUT1: C64.1 R133.2 TP9.1 U10.6 U10.7 | length 598
  Top Layer w8: R133.2@27956,20935 TP9.1@28100,20935 28105,20935 28220,20935 C64.1@28270,20985 28280.86,20985 28326.86,21031 28369.14,21031 28379,21040.86 28379,21085.46 28408.54,21115 28432.52,21115 U10.7@28433.31,21115.79 U10.6@28433.31,21135.47
LP_1K_OUT2: C66.1 R132.2 TP11.1 U11.6 U11.7 | length 558.3
  Top Layer w8: TP11.1@26130,20905 26250,20905 ; R132.2@26294,20825 26250,20869 26250,20905 ; U11.6@26478.31,21090.47 U11.7@26478.31,21070.79 26450.79,21070.79 26440,21060 26440,21020 26431,21011 26361,21011 26315,20965 C66.1@26310,20965 26250,20905
MISO: J1.1 TP_MISO.1 U6.11 | length 2779.1
  Top Layer w10: TP_MISO.1@26610,17990 v1(26715,17990) ; U6.11@28320.47,17497.48 28342.48,17497.48 v1@28370,17525
  POWER w10: v1@28370,17525 28395,17525 J1.1@28880,17040
  Bottom Layer w10: v1(26715,17990) 26781,18056 27839,18056 v1@28370,17525
  other v1: 28370,17535
MOSI: J1.4 TP_MOSI.1 U6.10 U12.5 U15.5 | length 9427.5
  Top Layer w10: v1(25970,19261) 25996.37,19261 26731,18526.37 26731,18085 26755,18061 26755,17865 v1(26710,17820) 26700,17810 TP_MOSI.1@26610,17810 ; v1(27172.63,21970) U12.5@27285.51,21970 27365,21970 27387.81,21947.19 27515.43,21947.19 27538.24,21970 U15.5@27685.51,21970 ; U6.10@28320.47,17465.98 28355.98,17465.98 v1(28370,17480)
  POWER w10: v1(28370,17480) 28370,17476.01 28404,17442.01 28404,17438.63 28852.63,16990 28930,16990 J1.4@28980,16940
  Bottom Layer w10: v1(25970,19261) 25970,19261.99 25999,19290.99 25999,19341 25986,19354 25986,22023.37 26138.63,22176 26966.63,22176 v1(27172.63,21970) ; v1(26710,17820) 26930,18040 27810,18040 v1(28370,17480)
N: C23.1 CON_N1.1 X1.1 | length 4828.6
  Top Layer w80: C23.1@20900,20961.81 20900,19907.56 X1.1@20740.04,19747.6 20740.04,19729.96 21450,19020 21450,17013.78 CON_N1.1@21483.78,16980 CON_N1.1@21720,16980 CON_N1.1@21956.22,16980
NetC9_1: C9.1 C10.1 R22.1 R23.1 U3.6 U3.7 | length 565.8
  Top Layer w10: C10.1@23329,21254 C9.1@23230,21254 R23.1@23230,21150 R22.1@23330,21150 ; C10.1@23330,21255 23365,21255 23399,21289 23556.52,21289 U3.7@23558.31,21290.79 U3.6@23558.31,21310.47
NetC9_2: C9.2 C10.2 R16.2 R17.1 | length 284.7
  Top Layer w10: C9.2@23230,21310 23226,21314 R16.2@23226,21390 R17.1@23330,21390 ; C9.2@23231,21311 C10.2@23330,21311
NetC11_1: C11.1 C12.1 R25.1 R26.1 U3.10 U3.11 | length 567.8
  Top Layer w10: U3.11@23721.69,21310.47 U3.10@23721.69,21290.79 23859.21,21290.79 23895,21255 C11.1@23965,21255 C12.1@24060,21255 R26.1@24060,21155 R25.1@23965,21155
NetC11_2: C11.2 C12.2 R19.1 R20.2 | length 274
  Top Layer w10: C11.2@23965,21311 C12.2@24060,21311 ; R19.1@23965,21395 R20.2@24064,21395 C12.2@24064,21315